# Altium PCB EXPANSION_BOARD.PcbDoc (part 1 of 2)
Units mm, origin at the board's own origin, x right, y up, seen from the top; angles counter-clockwise.
Board outline 115 x 60 mm, 2 copper layers (Top Layer, Bottom Layer), stack 1.58 mm thick; 104 components, 102 nets, 387 pads, 32 vias.
Unrouted connection lines stored in the file: 210.
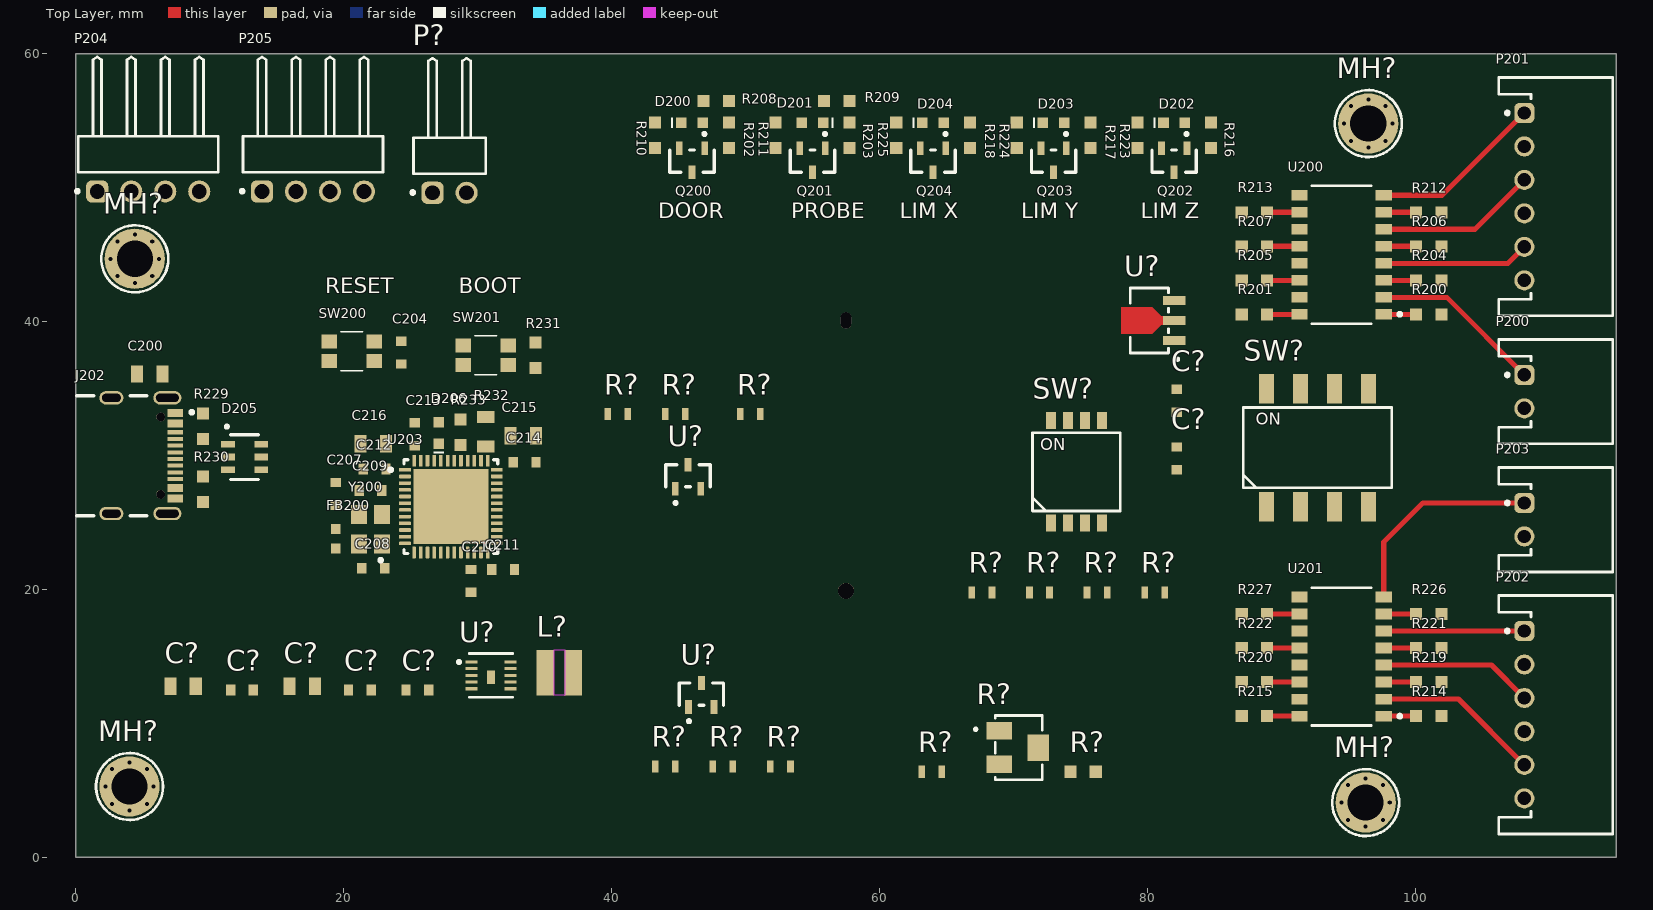
[diagram p0: Top Layer view]
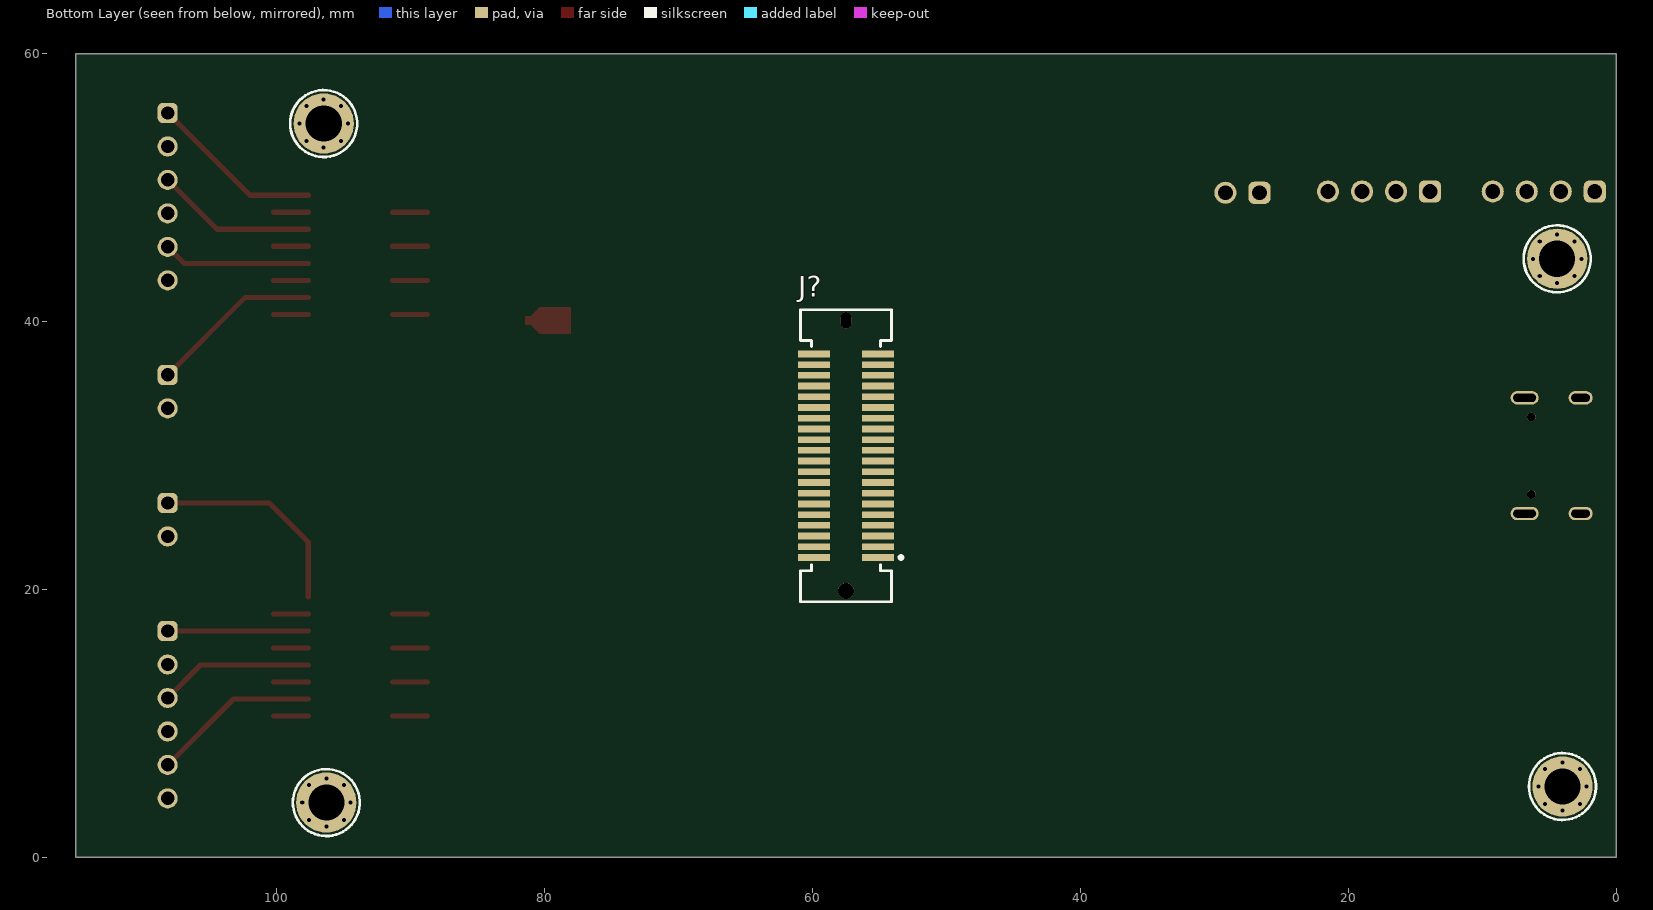
[diagram p1: Bottom Layer view, seen from below]

## Layer stack, top to bottom
Top Solder: solder mask 0.0102, Solder Resist, Dk 3.5
Top Layer: signal copper 0.0356
Dielectric 1: dielectric 1.5086, FR-4, Dk 4.8
Bottom Layer: signal copper 0.0356
Bottom Solder: solder mask 0.0102, Solder Resist, Dk 3.5

## Board outline
0,0 115,0 115,60 0,60

## Design rules (kind name [scope] priority, off if disabled: settings)
Clearance [All] p1: gap=0.15 ignorepadtopadclearanceinfootprint=FALSE
DiffPairsRouting [All] p1: maxlimit=0.254 minlimit=0.254 mostfreqgap=0.254 toplayer_minwidth=0.381 toplayer_maxwidth=0.381 toplayer_prefwidth=0.381 bottomlayer_minwidth=0.381 bottomlayer_maxwidth=0.381 bottomlayer_prefwidth=0.381 maxuncoupledlength=12.7
MinimumSolderMaskSliver [All] p1: minsoldermaskwidth=0.15
PolygonConnect [All] p1: connectstyle=Relief reliefconductorwidth=0.254 reliefentries=4 polygonreliefangle="90 Angle" airgapwidth=0.254
RoutingVias [All] p1: holewidth=0.711 width=1.27 viastyle="Through Hole" minholewidth=0.711 minwidth=1.27 maxholewidth=0.711 maxwidth=1.27
SolderMaskExpansion [All] p1: expansion=0 istentingtop=FALSE
SupplyNets "Schematic Supply Nets_10" [InNet('+3V3_ISO')] p1: voltage=0.000
SupplyNets "Schematic Supply Nets_9" [InNet('+VREF_DCMT')] p2: voltage=0.000
SupplyNets "Schematic Supply Nets_8" [InNet('+VREF_STPR')] p3: voltage=0.000
SupplyNets "Schematic Supply Nets_7" [InNet('+24V_PSU')] p4: voltage=0.000
SupplyNets "Schematic Supply Nets_6" [InNet('+VBUS')] p5: voltage=0.000
SupplyNets "Schematic Supply Nets_5" [InNet('+VDD_MCU')] p6: voltage=0.000
SupplyNets "Schematic Supply Nets_4" [InNet('+3V3')] p7: voltage=0.000
SupplyNets "Schematic Supply Nets_2" [InNet('GND')] p8: voltage=0.000
SupplyNets "Schematic Supply Nets_1" [InNet('+5V_ISO')] p9: voltage=0.000
SupplyNets "Schematic Supply Nets" [InNet('GND_ISO')] p10: voltage=0.000
Width [All] p1: maxlimit=1.27 minlimit=0.254 preferedwidth=0.508
28 further rules are at their usual default settings.

## Classes and differential pairs
component class 3_TEMP: C? J? L? MH? P? R? SW? U?
differential pair class USB: USB_D USB_DI
component class 1_MICROCONTROLADOR: C200 C204 C207 C208 C209 C210 C211 C212 C213 C214 C215 C216 D205 D206 FB200 J202 P204 P205 R229 R230 R231 R232 R233 SW200 SW201 U203 Y200
component class 2_INTERFACES_EXTERNAS: D200 D201 D202 D203 D204 P200 P201 P202 P203 Q200 Q201 Q202 Q203 Q204 R200 R201 R202 R203 R204 R205 R206 R207 R208 R209 R210 R211 R212 R213 R214 R215 R216 R217 R218 R219 R220 R221 R222 R223 R224 R225 R226 R227 U200 U201
differential pair USB_DI: +USB_DI_P -USB_DI_N
differential pair USB_D: +USB_D_P -USB_D_N

## Components (designator, comment, footprint, x,y, rotation, side; value= is the part's Value field where it differs from the comment)
C200 "4.7μF" WCAP-CSGP_0805_L2W1.25H1.25 5.5,36.1 r180 top
C204 "100nF, 16V" WCAP-CSGP_0603_L1.6W0.8H0.8_Wave 24.3,37.7 r270 top
C207 "100nF, 50V" WCAP-CSGP_0603_L1.6W0.8H0.8_Wave 19.4,27.15 r90 top
C208 "22pF, 16V" WCAP-CSGP_0603_L1.6W0.8H0.8_Wave 22.2,21.6 r0 top
C209 "22pF, 16V" WCAP-CSGP_0603_L1.6W0.8H0.8_Wave 22,27.4 r180 top
C210 "2.2μF" WCAP-CSGP_0603_L1.6W0.8H0.8_Wave 29.5,20.65 r90 top
C211 "100nF, 50V" WCAP-CSGP_0603_L1.6W0.8H0.8_Wave 31.9,21.5 r180 top
C212 "100nF, 50V" WCAP-CSGP_0603_L1.6W0.8H0.8_Wave 22.3,29 r0 top
C213 "100nF, 50V" WCAP-CSGP_0603_L1.6W0.8H0.8_Wave 25.3,31.6 r270 top
C214 "100nF, 50V" WCAP-CSGP_0603_L1.6W0.8H0.8_Wave 33.5,29.5 r180 top
C215 "10μF, 10V" WCAP-CSGP_0805_L2W1.25H1.25 33.4,31.5 r180 top
C216 "NM" WCAP-CSGP_0805_L2W1.25H1.25 22.2,30.9 r0 top
C? "1μF" WCAP-CSGP_0603_L1.6W0.8H0.8_Wave 82.2,29.8 r90 top
C? "1μF" WCAP-CSGP_0603_L1.6W0.8H0.8_Wave 82.2,34.1 r90 top
C? "470nF, 50V" WCAP-CSGP_0805_L2W1.25H1.25 8,12.8 r0 top
C? "220nF, 10V" WCAP-CSGP_0603_L1.6W0.8H0.8_Wave 25.5,12.5 r0 top
C? "2.2μF, 10V" WCAP-CSGP_0603_L1.6W0.8H0.8_Wave 21.2,12.5 r0 top
C? "1μF, 50V" WCAP-CSGP_0805_L2W1.25H1.25 16.9,12.8 r0 top
C? "100nF, 50V" WCAP-CSGP_0603_L1.6W0.8H0.8_Wave 12.4,12.5 r0 top
D200 "Blue, 3.2V, 140deg" WL-SMCW_0603_150060xx75003 46,54.865 r0 top
D201 "Yellow, 2V, 140deg" WL-SMCW_0603_150060xx75000 55,54.865 r180 top
D202 "Red, 2V, 140deg" WL-SMCW_0603_150060xx75003 82,54.865 r0 top
D203 "Red, 2V, 140deg" WL-SMCW_0603_150060xx75003 73,54.865 r0 top
D204 "Red, 2V, 140deg" WL-SMCW_0603_150060xx75003 64,54.865 r0 top
D205 "USBLC6-2SC6Y" SOT-23-6 12.6,29.9 r0 top value=2.5pF
D206 "Bright Green, 2V, 140deg" WL-SMCW_0603_150060xx75000 27.1,31.7 r90 top
FB200 "1000Ω" WE-CBF_0603_L1.6W0.8H0.8_HS_WB 19.4,23.8 r270 top
J202 "USB4105-GF-A" USB4105-GF-A 2.65,30 r270 top
J? "658801103040" 658801103040 57.5,30 r90 bottom
L? "47uH" WE-MAIA_3015 36.1,13.8 r0 top
MH? "Mounting Hole 2.5mm" MOUNTING_HOLE_M2P5_PLATED 4.4,44.7 r0 top
MH? "Mounting Hole 2.5mm" MOUNTING_HOLE_M2P5_PLATED 4,5.3 r0 top
MH? "Mounting Hole 2.5mm" MOUNTING_HOLE_M2P5_PLATED 96.5,54.8 r0 top
MH? "Mounting Hole 2.5mm" MOUNTING_HOLE_M2P5_PLATED 96.3,4.1 r0 top
P200 "68800211722" 68800211722 110.5,34.78 r90 top
P201 "68800611722" 68800611722 110.5,49.34 r90 top
P202 "68800611722" 68800611722 110.5,10.66 r90 top
P203 "68800211722" 68800211722 110.5,25.22 r90 top
P204 "61300411021" 61300411021 5.4,52.5 r180 top
P205 "61300411021" 61300411021 17.7,52.5 r180 top
P? "61300211021" 61300211021 27.9,52.4 r180 top
Q200 "SBC817-40LT3G" SOT-23-3 46,52 r180 top
Q201 "SBC817-40LT3G" SOT-23-3 55,52 r180 top
Q202 "SBC817-40LT3G" SOT-23-3 82,52 r180 top
Q203 "SBC817-40LT3G" SOT-23-3 73,52 r180 top
Q204 "SBC817-40LT3G" SOT-23-3 64,52 r180 top
R200 "487Ω" 0603-WAVE 101,40.555 r180 top
R201 "10kΩ" 0603-WAVE 88,40.555 r180 top
R202 "17.8kΩ" 0603-WAVE 48.75,53.915 r90 top
R203 "17.8kΩ" 0603-WAVE 57.75,53.915 r90 top
R204 "487Ω" 0603-WAVE 101,43.095 r180 top
R205 "10kΩ" 0603-WAVE 88,43.095 r180 top
R206 "487Ω" 0603-WAVE 101,45.635 r180 top
R207 "10kΩ" 0603-WAVE 88,45.635 r180 top
R208 "10kΩ" 0603-WAVE 47.8,56.5 r0 top
R209 "10kΩ" 0603-WAVE 56.8,56.5 r0 top
R210 "200Ω" 0603-WAVE 43.25,53.915 r270 top
R211 "200Ω" 0603-WAVE 52.25,53.915 r270 top
R212 "487Ω" 0603-WAVE 101,48.175 r180 top
R213 "10kΩ" 0603-WAVE 88,48.175 r180 top
R214 "487Ω" 0603-WAVE 101,10.555 r180 top
R215 "10kΩ" 0603-WAVE 88,10.555 r180 top
R216 "17.8kΩ" 0603-WAVE 84.75,53.915 r90 top
R217 "17.8kΩ" 0603-WAVE 75.75,53.915 r90 top
R218 "17.8kΩ" 0603-WAVE 66.75,53.915 r90 top
R219 "487Ω" 0603-WAVE 101,13.095 r180 top
R220 "10kΩ" 0603-WAVE 88,13.095 r180 top
R221 "487Ω" 0603-WAVE 101,15.635 r180 top
R222 "10kΩ" 0603-WAVE 88,15.635 r180 top
R223 "200Ω" 0603-WAVE 79.25,53.915 r270 top
R224 "200Ω" 0603-WAVE 70.25,53.915 r270 top
R225 "200Ω" 0603-WAVE 61.25,53.915 r270 top
R226 "487Ω" 0603-WAVE 101,18.175 r180 top
R227 "10kΩ" 0603-WAVE 88,18.175 r180 top
R229 "5.11kΩ" 0603-WAVE 9.5,32.2 r270 top
R230 "5.11kΩ" 0603-WAVE 9.5,27.5 r90 top
R231 "10kΩ" 0603-WAVE 34.3,37.5 r270 top
R232 "0Ω" 0805-WAVE 30.6,31.8 r270 top
R233 "200Ω" 0603-WAVE 28.7,31.75 r270 top
R? "10kΩ" 0603-REFLOW 80.55,19.8 r180 top
R? "0Ω" 0603-WAVE 75.2,6.4 r0 top
R? "100Ω" 0603-REFLOW 44.75,33.1 r0 top
R? "100Ω" 0603-REFLOW 40.45,33.1 r0 top
R? "10kΩ" 0603-REFLOW 71.95,19.8 r180 top
R? "10kΩ" 0603-REFLOW 67.65,19.8 r180 top
R? "10kΩ" 0603-REFLOW 76.25,19.8 r180 top
R? "10kΩ, 1/4W" TRIM-3224W 70.4,8.2 r0 top value=10kΩ
R? "11.5kΩ" 0603-REFLOW 48.3,6.8 r0 top
R? "11.5kΩ" 0603-REFLOW 50.35,33.1 r0 top
R? "1kΩ" 0603-REFLOW 63.9,6.4 r0 top
R? "8.87kΩ" 0603-REFLOW 52.6,6.8 r0 top
R? "8.87kΩ" 0603-REFLOW 44,6.8 r0 top
SW200 "434153017835" 434153017835 20.6,37.8 r180 top
SW201 "434153017835" 434153017835 30.6,37.5 r180 top
SW? "418121270804" 418121270804 92.7,30.6 r0 top
SW? "416131160804" 416131160804 74.7,28.8 r0 top
U200 "TLP293-4" SO-16 94.5,45 r180 top
U201 "TLP293-4" SO-16 94.5,15 r180 top
U203 "STM32F411CEU6" UFQFN-48-7X7_EXPOSED_PAD 28,26.2 r0 top
U? "LDK220U33R" SOT-89 78.2,39.1 r90 top
U? "L7983PU33R" 10-WFDFN-EP 31,13.6 r0 top
U? "TS3431CILT" SOT-23-3 46.7,12.2 r0 top
U? "TS3431CILT" SOT-23-3 45.7,28.5 r0 top
Y200 "25MHz" WE-XTAL_CFPX-180 22,24.5 r90 top

## Footprints (in the part's own frame and the unit in brackets; to place one, negate y for a bottom-side part, rotate by r counter-clockwise, add the part's x,y. Pads: shape width x height; smd on the part's side, far side on the other; paste and mask are expansions set on the pad)
10-WFDFN-EP [mil]
  rect 35.43x9 smd paste+0 mask+0: 1(-57,39.37) 2(-57,19.68) 3(-57,0) 4(-57,-19.69) 5(-57,-39.37) 6(57,-39.37) 7(57,-19.69) 8(57,0) 9(57,19.68) 10(57,39.37)
  rect 24x39 smd paste+0 mask+0: 11(0,-5.91)
  silkscreen extent -98,-64 64,64, body extent -59,-59 59,59, height 30
0603-REFLOW [mm]
  rect 0.5x0.9 smd: 1(-0.75,0) 2(0.75,0)
  body extent -0.8,-0.4 0.8,0.4, height 0.45
0603-WAVE [mm]
  rect 0.9x0.9 smd: 1(-0.95,0) 2(0.95,0)
  body extent -0.8,-0.4 0.8,0.4, height 0.45
0805-WAVE [mm]
  rect 0.9x1.3 smd: 1(-1.1,0) 2(1.1,0)
  body extent -1,-0.63 1,0.62, height 0.5
61300211021 [mm] "Pin Header, pitch 2.54 mm, THT, Angled, single row, 2p"
  rrect50% 1.65x1.65 hole 1.1: 1(1.27,2.77)
  round 1.65 hole 1.1: 2(-1.27,2.77)
  silkscreen extent -2.69,-7.27 2.87,2.87, body extent -2.54,-7.27 2.54,3.09, height 2.58
61300411021 [mm] "Pin Header, pitch 2.54 mm, THT, Angled, single row, 4p"
  rrect50% 1.65x1.65 hole 1.1: 1(3.81,2.77)
  round 1.65 hole 1.1: 2(1.27,2.77) 3(-1.27,2.77) 4(-3.81,2.77)
  silkscreen extent -5.23,-7.27 5.41,2.87, body extent -5.08,-7.27 5.08,3.09, height 2.58
68800211722 [mm] "2.50mm ¡°J¡± Type Male Horizontal Shrouded Header, 2p"
  rrect50% 1.5x1.5 hole 1: 1(1.25,2.35)
  round 1.5 hole 1: 2(-1.25,2.35)
  silkscreen extent -3.9,-4.25 3.9,4.25, body extent -3.75,-4.15 3.75,4.15, height 4.23
68800611722 [mm] "2.50mm ¡°J¡± Type Male Horizontal Shrouded Header, 6p"
  rrect50% 1.5x1.5 hole 1: 1(6.25,2.35)
  round 1.5 hole 1: 2(3.75,2.35) 3(1.25,2.35) 4(-1.25,2.35) 5(-3.75,2.35) 6(-6.25,2.35)
  silkscreen extent -8.9,-4.25 8.9,4.25, body extent -8.75,-4.15 8.75,4.15, height 4.23
416131160804 [mm] "SMD Dip Switch, Small Compact, Raised Actuator, 4pin"
  rect 0.76x1.27 smd: 1(-1.905,-3.81) 2(-0.635,-3.81) 3(0.635,-3.81) 4(1.905,-3.81) 5(1.905,3.81) 6(0.635,3.81) 7(-0.635,3.81) 8(-1.905,3.81)
  silkscreen extent -3.27,-2.93 3.27,2.93, body extent -3.12,-4.22 3.13,4.22, height 2.7
418121270804 [mm] "2.54 mm small compact SMD with raised actuator, 04p"
  rect 1.1x2.2 smd: 1(-3.81,-4.4) 2(-1.27,-4.4) 3(1.27,-4.4) 4(3.81,-4.4) 5(3.81,4.4) 6(1.27,4.4) 7(-1.27,4.4) 8(-3.81,4.4)
  silkscreen extent -5.55,-3 5.55,3, body extent -5.3,-4.85 5.3,4.85, height 4.41
434153017835 [mm] "Tact Switch, SMD, body 3.5x2.9mm"
  rect 1.15x1.05 smd: A1(-1.675,0.725) A2(1.675,0.725) B1(-1.675,-0.725) B2(1.675,-0.725)
  silkscreen extent -0.8,-1.45 0.8,1.45, body extent -2.15,-1.45 2.15,1.45, height 1.7
658801103040 [mm] "0.80mm SMT Female Shrouded Vertical Receptacle 11.75mm height, 40p"
  rect 0.5x2.4 smd: 1(-7.6,-2.4) 2(-7.6,2.4) 3(-6.8,-2.4) 4(-6.8,2.4) 5(-6,-2.4) 6(-6,2.4) 7(-5.2,-2.4) 8(-5.2,2.4) 9(-4.4,-2.4) 10(-4.4,2.4) 11(-3.6,-2.4) 12(-3.6,2.4) 13(-2.8,-2.4) 14(-2.8,2.4) 15(-2,-2.4) 16(-2,2.4) 17(-1.2,-2.4) 18(-1.2,2.4) 19(-0.4,-2.4) 20(-0.4,2.4) 21(0.4,-2.4) 22(0.4,2.4) 23(1.2,-2.4) 24(1.2,2.4) 25(2,-2.4) 26(2,2.4) 27(2.8,-2.4) 28(2.8,2.4) 29(3.6,-2.4) 30(3.6,2.4) 31(4.4,-2.4) 32(4.4,2.4) 33(5.2,-2.4) 34(5.2,2.4) 35(6,-2.4) 36(6,2.4) 37(6.8,-2.4) 38(6.8,2.4) 39(7.6,-2.4) 40(7.6,2.4)
  round 1.2 hole 1.2 unplated: M1(-10.1,0)
  oval 1.2x0.8 hole 0.8 slot 1.2 at 0 deg unplated: M2(10.1,0)
  silkscreen extent -10.9,-4.22 10.9,3.4, body extent -10.9,-3.4 10.9,3.4, height 11.97
MOUNTING_HOLE_M2P5_PLATED [mm]
  round 4.5 hole 2.7: H(0,0)
  silkscreen extent -2.5,-2.5 2.5,2.5
SO-16 [mm]
  rect 1.2x0.8 smd: 1(-3.15,4.445) 2(-3.15,3.175) 3(-3.15,1.905) 4(-3.15,0.635) 5(-3.15,-0.635) 6(-3.15,-1.905) 7(-3.15,-3.175) 8(-3.15,-4.445) 9(3.15,-4.445) 10(3.15,-3.175) 11(3.15,-1.905) 12(3.15,-0.635) 13(3.15,0.635) 14(3.15,1.905) 15(3.15,3.175) 16(3.15,4.445)
  silkscreen extent -4.48,-5.15 2.23,5.15, body extent -3.5,-5.15 3.5,5.15, height 2.3
SOT-23-3 [mil]
  rect 20x40 smd mask+3.94: 1(-37.4,-38) 2(37.4,-38) 3(0,32.75)
  silkscreen extent -65,-84 65,33, body extent -57,-47 57,47, height 44
SOT-23-6 [mil]
  rect 40x20 smd paste+0: 1(-49,37.4) 2(-49,0) 3(-49,-37.4) 4(49,-37.4) 5(49,0) 6(49,37.4)
  silkscreen extent -56,-66 40,93, body extent -49,-59 49,59, height 43
SOT-89 [mm]
  rect 0.65x1.7 smd paste+0: 1(-0.495,-3.806) 2(1,-3.806) 3(2.495,-3.806)
  Top Layer region: 1.325,-3.251 0.675,-3.251 0.675,-2.85 0,-2.175 0,0.15 2,0.15 2,-2.175 1.325,-2.85
  silkscreen extent -2,-4.16 3.43,-0.53, body extent -1.3,-4.46 3.3,-0.21, height 1.35
TRIM-3224W [mm]
  rect 1.9x1.3 smd: 1(-1.45,1.25) 3(-1.45,-1.25)
  rect 1.6x2 smd: 2(1.45,0)
  silkscreen extent -3.32,-2.4 1.75,2.4, body extent -1.95,-2.4 1.95,2.4, height 5.3
UFQFN-48-7X7_EXPOSED_PAD [mm]
  rrect25% 0.87x0.27 smd mask+0: 1(-3.43,2.75) 2(-3.43,2.25) 3(-3.43,1.75) 4(-3.43,1.25) 5(-3.43,0.75) 6(-3.43,0.25) 7(-3.43,-0.25) 8(-3.43,-0.75) 9(-3.43,-1.25) 10(-3.43,-1.75) 11(-3.43,-2.25) 12(-3.43,-2.75) 25(3.43,-2.75) 26(3.43,-2.25) 27(3.43,-1.75) 28(3.43,-1.25) 29(3.43,-0.75) 30(3.43,-0.25) 31(3.43,0.25) 32(3.43,0.75) 33(3.43,1.25) 34(3.43,1.75) 35(3.43,2.25) 36(3.43,2.75)
  rrect25% 0.27x0.87 smd mask+0: 13(-2.75,-3.43) 14(-2.25,-3.43) 15(-1.75,-3.43) 16(-1.25,-3.43) 17(-0.75,-3.43) 18(-0.25,-3.43) 19(0.25,-3.43) 20(0.75,-3.43) 21(1.25,-3.43) 22(1.75,-3.43) 23(2.25,-3.43) 24(2.75,-3.43) 37(2.75,3.43) 38(2.25,3.43) 39(1.75,3.43) 40(1.25,3.43) 41(0.75,3.43) 42(0.25,3.43) 43(-0.25,3.43) 44(-0.75,3.43) 45(-1.25,3.43) 46(-1.75,3.43) 47(-2.25,3.43) 48(-2.75,3.43)
  rect 5.6x5.6 smd paste-4 mask+0: 49(0,0)
  silkscreen extent -4.63,-3.5 3.5,3.5, body extent -3.5,-3.5 3.5,3.5, height 0.6
USB4105-GF-A [mm]
  rect 0.6x1.15 smd mask+0: A1_B12(-3.2,4.755) A4_B9(-2.4,4.755) B1_A12(3.2,4.755) B4_A9(2.4,4.755)
  rect 0.3x1.15 smd mask+0: A5(-1.25,4.755) A6(-0.25,4.755) A7(0.25,4.755) A8(1.25,4.755) B5(1.75,4.755) B6(0.75,4.755) B7(-0.75,4.755) B8(-1.75,4.755)
  oval 1x2.1 hole 0.6 slot 1.7 at 90 deg: SH(-4.32,4.18) SH(4.32,4.18)
  oval 1x1.8 hole 0.6 slot 1.4 at 90 deg: SH(-4.32,0) SH(4.32,0)
  round 0.65 hole 0.65 unplated: ""(-2.89,3.68) ""(2.89,3.68)
  silkscreen extent -4.47,-2.6 4.47,6.13, body extent -4.47,-2.6 4.47,5.11, height 3.31
WCAP-CSGP_0603_L1.6W0.8H0.8_Wave [mm] "Ceramic Capacitors, 0603, body 1.6x0.8mm"
  rect 0.7x0.8 smd: 1(-0.85,0) 2(0.85,0)
  body extent -0.8,-0.4 0.8,0.4, height 0.8
WCAP-CSGP_0805_L2W1.25H1.25 [mm] "Ceramic Capacitors, body 2x1.25mm"
  rect 0.9x1.3 smd: 1(-0.95,0) 2(0.95,0)
  body extent -1,-0.63 1,0.63, height 1.25
WE-CBF_0603_L1.6W0.8H0.8_HS_WB [mm] "SMD EMI Suppression Ferrite  Bead, body 1.60x0.80mm"
  rect 0.75x0.7 smd: 1(-0.725,0) 2(0.725,0)
  body extent -0.8,-0.4 0.8,0.4, height 0.8
WE-MAIA_3015 [mm] "SMD Power Inductor, 2-leads, body 3x3mm"
  rect 1.3x3.4 smd: 1(-1.05,0) 2(1.05,0)
  Top Layer keep-out region: -0.4,1.7 0.4,1.7 0.4,-1.7 -0.4,-1.7
  body extent -1.5,-1.5 1.5,1.5, height 1.5
WE-XTAL_CFPX-180 [mm] "Quartz Crystal, size CFPX-180, body 3.4x2.7mm"
  rect 1.4x1.2 smd: 1(-1.1,-0.85) 2(1.1,-0.85) 3(1.1,0.85) 4(-1.1,0.85)
  silkscreen extent -2.42,-0.88 -2.18,-0.63, body extent -1.7,-1.35 1.7,1.35, height 0.8
WL-SMCW_0603_150060xx75000 [mm] "SMD Mono-color Chip LED, body 1.60 x 0.80 mm"
  rect 0.8x0.8 smd: 1(-0.8,0) 2(0.8,0)
  silkscreen extent -1.55,-0.4 -1.4,0.4, body extent -0.8,-0.4 0.8,0.4, height 0.7
WL-SMCW_0603_150060xx75003 [mm] "SMD Mono-color Chip LED, body 1.6x0.8mm"
  rect 0.8x0.8 smd: 1(-0.8,0) 2(0.8,0)
  silkscreen extent -1.55,-0.4 -1.4,0.4, body extent -0.8,-0.4 0.8,0.4, height 0.7

## Part data
C200: library part 885012207053, "WCAP-CSGP Multilayer Ceramic Chip Capacitor, General Purpose, size 0805, 4.7μF, 16V", Capacitance=4.7uF, Capacitance Tolerance=+/-10%, Case/Size Code=0805, Insulation Resistance=0.02Gohm, Manufacturer="Wurth Elektronik", Operating Temperature Max=125degC, Operating Temperature Min=-55degC, Rated Voltage (DC)=16V, Category="Multilayer Ceramic Chip Capacitors", Ceramic Type=X7R, ComponentLink1Description="Website Link", ComponentLink1URL=https://www.we-online.com/redexpert/article/885012207053?ad, ComponentLink2Description="Datasheet Link", ComponentLink2URL=https://www.we-online.com/redexpert/spec/885012207053?ad, Dissipation Factor=10%, Height=1.25mm, Length=2mm, Manufacturer Part Number=885012207053, Match Code=WCAP-CSGP, Mount="Surface Mount", Packaging="Tape and Reel", Technical Reference=X7R0805475K016DFCT10000, Width=1.25mm
C204: library part 885012206046, "WCAP-CSGP Multilayer Ceramic Chip Capacitor, General Purpose, size 0603, 100nF, 16V", Capacitance=100nF, Capacitance Tolerance=+/-10%, Case/Size Code=0603, Insulation Resistance=5Gohm, Manufacturer="Wurth Elektronik", Operating Temperature Max=125degC, Operating Temperature Min=-55degC, Rated Voltage (DC)=16V, Category="Multilayer Ceramic Chip Capacitors", Ceramic Type=X7R, ComponentLink1Description="Website Link", ComponentLink1URL=https://www.we-online.com/redexpert/article/885012206046?ad, ComponentLink2Description="Datasheet Link", ComponentLink2URL=https://www.we-online.com/redexpert/spec/885012206046?ad, Dissipation Factor=3.5%, Height=0.8mm, Length=1.6mm, Manufacturer Part Number=885012206046, Match Code=WCAP-CSGP, Mount="Surface Mount", Packaging="Tape and Reel", Technical Reference=X7R0603104K016DFCT10000, Width=0.8mm
C207 C211 C212 C213 C214 C?: library part 885012206095, "WCAP-CSGP Multilayer Ceramic Chip Capacitor, General Purpose, size 0603, 100nF, 50V", Capacitance=100nF, Capacitance Tolerance=+/-10%, Case/Size Code=0603, Insulation Resistance=5Gohm, Manufacturer="Wurth Elektronik", Operating Temperature Max=125degC, Operating Temperature Min=-55degC, Rated Voltage (DC)=50V, Category="Multilayer Ceramic Chip Capacitors", Ceramic Type=X7R, ComponentLink1Description="Website Link", ComponentLink1URL=https://www.we-online.com/redexpert/article/885012206095?ad, ComponentLink2Description="Datasheet Link", ComponentLink2URL=https://www.we-online.com/redexpert/spec/885012206095?ad, Dissipation Factor=3%, Height=0.8mm, Length=1.6mm, Manufacturer Part Number=885012206095, Match Code=WCAP-CSGP, Mount="Surface Mount", Packaging="Tape and Reel", Technical Reference=X7R0603104K050DFCT10000, Width=0.8mm
C208 C209: library part 885012006019, "WCAP-CSGP Multilayer Ceramic Chip Capacitor, General Purpose, size 0603, 22pF, 16V", Capacitance=22pF, Capacitance Tolerance=+/-5%, Case/Size Code=0603, Insulation Resistance=10Gohm, Manufacturer="Wurth Elektronik", Operating Temperature Max=125degC, Operating Temperature Min=-55degC, Rated Voltage (DC)=16V, Category="Multilayer Ceramic Chip Capacitors", Ceramic Type=NP0, ComponentLink1Description="Website Link", ComponentLink1URL=https://www.we-online.com/redexpert/article/885012006019?ad, ComponentLink2Description="Datasheet Link", ComponentLink2URL=https://www.we-online.com/redexpert/spec/885012006019?ad, Height=0.8mm, Length=1.6mm, Manufacturer Part Number=885012006019, Match Code=WCAP-CSGP, Mount="Surface Mount", Packaging="Tape and Reel", Q Factor=840, Technical Reference=NP00603220J016DFCT10000, Width=0.8mm
C210: library part 885012106004, "WCAP-CSGP Multilayer Ceramic Chip Capacitor, General Purpose, size 0603, 2.2μF, 6.3V", Capacitance=2.2uF, Capacitance Tolerance=+/-20%, Case/Size Code=0603, Insulation Resistance=0.05Gohm, Manufacturer="Wurth Elektronik", Operating Temperature Max=85degC, Operating Temperature Min=-55degC, Rated Voltage (DC)=6.3V, Category="Multilayer Ceramic Chip Capacitors", Ceramic Type=X5R, ComponentLink1Description="Website Link", ComponentLink1URL=https://www.we-online.com/redexpert/article/885012106004?ad, ComponentLink2Description="Datasheet Link", ComponentLink2URL=https://www.we-online.com/redexpert/spec/885012106004?ad, Dissipation Factor=10%, Height=0.8mm, Length=1.6mm, Manufacturer Part Number=885012106004, Match Code=WCAP-CSGP, Mount="Surface Mount", Packaging="Tape and Reel", Technical Reference=X5R0603225M6R3DFCT10000, Width=0.8mm
C215 C216: library part 885012207026, "WCAP-CSGP Multilayer Ceramic Chip Capacitor, General Purpose, size 0805, 10μF, 10V", Capacitance=10uF, Capacitance Tolerance=+/-10%, Case/Size Code=0805, Insulation Resistance=0.01Gohm, Manufacturer="Wurth Elektronik", Operating Temperature Max=125degC, Operating Temperature Min=-55degC, Rated Voltage (DC)=10V, Category="Multilayer Ceramic Chip Capacitors", Ceramic Type=X7R, ComponentLink1Description="Website Link", ComponentLink1URL=https://www.we-online.com/redexpert/article/885012207026?ad, ComponentLink2Description="Datasheet Link", ComponentLink2URL=https://www.we-online.com/redexpert/spec/885012207026?ad, Dissipation Factor=10%, Height=1.25mm, Length=2mm, Manufacturer Part Number=885012207026, Match Code=WCAP-CSGP, Mount="Surface Mount", Packaging="Tape and Reel", Technical Reference=X7R0805106K010DFCT10000, Width=1.25mm
C? C?: library part 885012206052, "WCAP-CSGP Multilayer Ceramic Chip Capacitor, General Purpose, size 0603, 1μF, 16V", Capacitance=1uF, Capacitance Tolerance=+/-10%, Case/Size Code=0603, Insulation Resistance=0.1Gohm, Manufacturer="Wurth Elektronik", Operating Temperature Max=125degC, Operating Temperature Min=-55degC, Rated Voltage (DC)=16V, Category="Multilayer Ceramic Chip Capacitors", Ceramic Type=X7R, ComponentLink1Description="Website Link", ComponentLink1URL=https://www.we-online.com/redexpert/article/885012206052?ad, ComponentLink2Description="Datasheet Link", ComponentLink2URL=https://www.we-online.com/redexpert/spec/885012206052?ad, Dissipation Factor=10%, Height=0.8mm, Length=1.6mm, Manufacturer Part Number=885012206052, Match Code=WCAP-CSGP, Mount="Surface Mount", Packaging="Tape and Reel", Technical Reference=X7R0603105K016DFCT10000, Width=0.8mm
C?: library part 885012207102, "WCAP-CSGP Multilayer Ceramic Chip Capacitor, General Purpose, size 0805, 470nF, 50V", Capacitance=470nF, Capacitance Tolerance=+/-10%, Case/Size Code=0805, Insulation Resistance=1.1Gohm, Manufacturer="Wurth Elektronik", Operating Temperature Max=125degC, Operating Temperature Min=-55degC, Rated Voltage (DC)=50V, Category="Multilayer Ceramic Chip Capacitors", Ceramic Type=X7R, ComponentLink1Description="Website Link", ComponentLink1URL=https://www.we-online.com/redexpert/article/885012207102?ad, ComponentLink2Description="Datasheet Link", ComponentLink2URL=https://www.we-online.com/redexpert/spec/885012207102?ad, Dissipation Factor=3%, Height=1.25mm, Length=2mm, Manufacturer Part Number=885012207102, Match Code=WCAP-CSGP, Mount="Surface Mount", Packaging="Tape and Reel", Technical Reference=X7R0805474K050DFCT10000, Width=1.25mm
C?: library part 885012206022, "WCAP-CSGP Multilayer Ceramic Chip Capacitor, General Purpose, size 0603, 220nF, 10V", Capacitance=220nF, Capacitance Tolerance=+/-10%, Case/Size Code=0603, Insulation Resistance=2.3Gohm, Manufacturer="Wurth Elektronik", Operating Temperature Max=125degC, Operating Temperature Min=-55degC, Rated Voltage (DC)=10V, Category="Multilayer Ceramic Chip Capacitors", Ceramic Type=X7R, ComponentLink1Description="Website Link", ComponentLink1URL=https://www.we-online.com/redexpert/article/885012206022?ad, ComponentLink2Description="Datasheet Link", ComponentLink2URL=https://www.we-online.com/redexpert/spec/885012206022?ad, Dissipation Factor=5%, Height=0.8mm, Length=1.6mm, Manufacturer Part Number=885012206022, Match Code=WCAP-CSGP, Mount="Surface Mount", Packaging="Tape and Reel", Technical Reference=X7R0603224K010DFCT10000, Width=0.8mm
C?: library part 885012206027, "WCAP-CSGP Multilayer Ceramic Chip Capacitor, General Purpose, size 0603, 2.2μF, 10V", Capacitance=2.2uF, Capacitance Tolerance=+/-10%, Case/Size Code=0603, Insulation Resistance=0.02Gohm, Manufacturer="Wurth Elektronik", Operating Temperature Max=125degC, Operating Temperature Min=-55degC, Rated Voltage (DC)=10V, Category="Multilayer Ceramic Chip Capacitors", Ceramic Type=X7R, ComponentLink1Description="Website Link", ComponentLink1URL=https://www.we-online.com/redexpert/article/885012206027?ad, ComponentLink2Description="Datasheet Link", ComponentLink2URL=https://www.we-online.com/redexpert/spec/885012206027?ad, Dissipation Factor=10%, Height=0.8mm, Length=1.6mm, Manufacturer Part Number=885012206027, Match Code=WCAP-CSGP, Mount="Surface Mount", Packaging="Tape and Reel", Technical Reference=X7R0603225K010DFCT10000, Width=0.8mm
C?: library part 885012207103R, "WCAP-CSGP Multilayer Ceramic Chip Capacitor, General Purpose, size 0805, 1μF, 50V", Capacitance=1uF, Capacitance Tolerance=+/-10%, Case/Size Code=0805, Insulation Resistance=0.1Gohm, Manufacturer="Wurth Elektronik", Operating Temperature Max=125degC, Operating Temperature Min=-55degC, Rated Voltage (DC)=50V, Category="Multilayer Ceramic Chip Capacitors", Ceramic Type=X7R, ComponentLink1Description="Website Link", ComponentLink1URL=https://www.we-online.com/redexpert/article/885012207103R?ad, ComponentLink2Description="Datasheet Link", ComponentLink2URL=https://www.we-online.com/redexpert/spec/885012207103R?ad, Dissipation Factor=10%, Height=1.25mm, Length=2mm, Manufacturer Part Number=885012207103R, Match Code=WCAP-CSGP, Mount="Surface Mount", Packaging="Tape and Reel", Technical Reference=X7R0805105K050DFCT20000, Width=1.25mm
D200: library part 150060BS75003, "WL-SMCW Mono-color Chip LED Waterclear, SMT, size 0603, Blue, 3.2V, 140°", Case/Size Code=0603, Emitting Color=Blue, Forward Voltage=3.2V, Manufacturer="Wurth Elektronik", Operating Temperature Max=100degC, Operating Temperature Min=-40degC, Category="Signal LEDs", Chip Technology=InGaN, ComponentLink1Description="Website Link", ComponentLink1URL=https://www.we-online.com/redexpert/article/150060BS75003?ad, ComponentLink2Description="Datasheet Link", ComponentLink2URL=https://www.we-online.com/redexpert/spec/150060BS75003?ad, Dominant Wavelength=470nm, Height=0.7mm, Length=1.6mm, Luminous Intensity=350mcd, Manufacturer Part Number=150060BS75003, Match Code=WL-SMCW, Mount="Surface Mount", Packaging="Tape and Reel", Peak Wavelength=465nm, Viewing Angle=140deg, Width=0.8mm
D201: library part 150060YS75000, "WL-SMCW Mono-color Chip LED Waterclear, SMT, size 0603, Yellow, 2V, 140°", Case/Size Code=0603, Emitting Color=Yellow, Forward Voltage=2V, Manufacturer="Wurth Elektronik", Operating Temperature Max=85degC, Operating Temperature Min=-40degC, Category="Signal LEDs", Chip Technology=AlInGaP, ComponentLink1Description="Website Link", ComponentLink1URL=https://www.we-online.com/redexpert/article/150060YS75000?ad, ComponentLink2Description="Datasheet Link", ComponentLink2URL=https://www.we-online.com/redexpert/spec/150060YS75000?ad, Dominant Wavelength=590nm, Height=0.7mm, Length=1.6mm, Luminous Intensity=120mcd, Manufacturer Part Number=150060YS75000, Match Code=WL-SMCW, Mount="Surface Mount", Packaging="Tape and Reel", Peak Wavelength=595nm, Viewing Angle=140deg, Width=0.8mm
D202 D203 D204: library part 150060RS75003, "WL-SMCW Mono-color Chip LED Waterclear, SMT, size 0603, Red, 2V, 140°", Case/Size Code=0603, Emitting Color=Red, Forward Voltage=2V, Manufacturer="Wurth Elektronik", Operating Temperature Max=100degC, Operating Temperature Min=-40degC, Category="Signal LEDs", Chip Technology=AlInGaP, ComponentLink1Description="Website Link", ComponentLink1URL=https://www.we-online.com/redexpert/article/150060RS75003?ad, ComponentLink2Description="Datasheet Link", ComponentLink2URL=https://www.we-online.com/redexpert/spec/150060RS75003?ad, Dominant Wavelength=625nm, Height=0.7mm, Length=1.6mm, Luminous Intensity=530mcd, Manufacturer Part Number=150060RS75003, Match Code=WL-SMCW, Mount="Surface Mount", Packaging="Tape and Reel", Peak Wavelength=630nm, Viewing Angle=140deg, Width=0.8mm
D205: "TVS DIODE 5.25VWM 17VC SOT23-6", Breakdown Voltage=6V, Case/Package=SOT-23-6, Clamping Voltage=17V, Forward Voltage=860mV, Leakage Current=150nA, Manufacturer=STMicroelectronics, Max Junction Temperature (Tj)=150°C, Min Operating Temperature=-40°C, Operating Supply Voltage=1.1V, Peak Pulse Current=5A, Power Line Protection=Yes, Reverse Standoff Voltage=5.25V, Supplier Part Number=497-11882-1-ND, Test Current=1mA, Category="TVS Diodes", China RoHS=Compliant, ComponentLink1Description=https://datasheet.octopart.com:443/USBLC6-2SC6Y-STMicroelectronics-datasheet-12533815.pdf?src-supplier=ODG+(Origin+Data+Global), ComponentLink1URL=https://datasheet.octopart.com:443/USBLC6-2SC6Y-STMicroelectronics-datasheet-12533815.pdf?src-supplier=ODG+(Origin+Data+Global), ComponentLink2Description=https://datasheet.octopart.com:443/USBLC6-2SC6Y-STMicroelectronics-datasheet-13733956.pdf?src-supplier=STMicroelectronics, ComponentLink2URL=https://datasheet.octopart.com:443/USBLC6-2SC6Y-STMicroelectronics-datasheet-13733956.pdf?src-supplier=STMicroelectronics, ComponentLink3Description=https://datasheet.octopart.com:443/USBLC6-2SC6Y-STMicroelectronics-datasheet-10412581.pdf?src-supplier=Factory+Futures, ComponentLink3URL=https://datasheet.octopart.com:443/USBLC6-2SC6Y-STMicroelectronics-datasheet-10412581.pdf?src-supplier=Factory+Futures, ComponentLink4Description=https://datasheet.octopart.com:443/USBLC6-2SC6Y-STMicroelectronics-datasheet-525477.pdf?src-supplier=Factory+Futures, ComponentLink4URL=https://datasheet.octopart.com:443/USBLC6-2SC6Y-STMicroelectronics-datasheet-525477.pdf?src-supplier=Factory+Futures, Depth=1.75mm, Direction=Unidirectional, Element Configuration=Dual, ESD Protection=Yes, ESR=330Ω, Height=1.45mm, Lead Free="Lead Free", Length=3mm, Lifecycle Status=Production, Manufacturer Part Number=USBLC6-2SC6Y, Max Operating Temperature=150°C, Max Reverse Leakage Current=150nA, Min Breakdown Voltage=6V, Mounting Technology="Surface Mount", Number of Bidirectional Channels=2, Number of Channels=2, Number of Elements=1, Number of Terminals=6, Packaging="Tape and Reel", Peak Reverse Current=150nA, Pins=6, Polarity=Unidirectional, Pricing="1=0.46, 10=0.298, 100=0.211, 500=0.164, 1000=0.144 (USD)", Radiation Hardening=No, REACH SVHC=Yes, RoHS=Compliant, Schedule B="8536300000, 8536300000|8536300000|8536300000|8536300000|8536300000", Stock=64605, Supplier=DigiKey, Termination=SMD/SMT, Width=1.75mm
D206: library part 150060VS75000, "WL-SMCW Mono-color Chip LED Waterclear, SMT, size 0603, Bright Green, 2V, 140°", Case/Size Code=0603, Emitting Color="Bright Green", Forward Voltage=2V, Manufacturer="Wurth Elektronik", Operating Temperature Max=85degC, Operating Temperature Min=-40degC, Category="Signal LEDs", Chip Technology=AlInGaP, ComponentLink1Description="Website Link", ComponentLink1URL=https://www.we-online.com/redexpert/article/150060VS75000?ad, ComponentLink2Description="Datasheet Link", ComponentLink2URL=https://www.we-online.com/redexpert/spec/150060VS75000?ad, Dominant Wavelength=570nm, Height=0.7mm, Length=1.6mm, Luminous Intensity=40mcd, Manufacturer Part Number=150060VS75000, Match Code=WL-SMCW, Mount="Surface Mount", Packaging="Tape and Reel", Peak Wavelength=572nm, Viewing Angle=140deg, Width=0.8mm
FB200: library part 74279266, "WE-CBF SMT EMI Suppression Ferrite Bead, size 0603, 1000Ω, 0.65A", Case/Size Code=0603, DC Resistance Max=0.6Ω, Manufacturer="Wurth Elektronik", Operating Temperature Max=125degC, Operating Temperature Min=-55degC, Rated Current=0.65A, Category="Ferrites for PCB Assembly", ComponentLink1Description="Website Link", ComponentLink1URL=https://www.we-online.com/redexpert/article/74279266?ad, ComponentLink2Description="Datasheet Link", ComponentLink2URL=https://www.we-online.com/redexpert/spec/74279266?ad, Height=0.8mm, Impedance @100MHz=1000Ω, Impedance Max=1350Ω, Impedance Max Test Condition=140MHz, Length=1.6mm, Manufacturer Part Number=74279266, Match Code=WE-CBF, Mount="Surface Mount", Packaging="Tape and Reel", Type="Wide Band", Width=0.8mm
J202: "CONN RCP USB2.0 TYP C 16P SMD RA", Contact Resistance=50mΩ, Current Rating=6.25A, Dielectric Material="Liquid Crystal Polymer", Insulation Resistance=100MΩ, Manufacturer="Global Connector Technology", Max Operating Temperature=85°C, Min Operating Temperature=-40°C, Supplier Part Number=2073-USB4105-GF-ACT-ND, Voltage Rating=20V, Category="USB Connectors", China RoHS=Compliant, ComponentLink1Description=https://datasheet.octopart.com:443/USB4105-GF-A-GCT-datasheet-166929323.pdf?src-supplier=SOS+electronic, ComponentLink1URL=https://datasheet.octopart.com:443/USB4105-GF-A-GCT-datasheet-166929323.pdf?src-supplier=SOS+electronic, ComponentLink2Description=https://datasheet.octopart.com:443/USB4105-GF-A-GCT-datasheet-188935996.pdf?src-supplier=TME, ComponentLink2URL=https://datasheet.octopart.com:443/USB4105-GF-A-GCT-datasheet-188935996.pdf?src-supplier=TME, ComponentLink3Description=https://datasheet.octopart.com:443/USB4105-GF-A-GCT-datasheet-188869076.pdf?src-supplier=TME, ComponentLink3URL=https://datasheet.octopart.com:443/USB4105-GF-A-GCT-datasheet-188869076.pdf?src-supplier=TME, ComponentLink4Description=https://datasheet.octopart.com:443/USB4105-GF-A-GCT-datasheet-166927665.pdf?src-supplier=TME, ComponentLink4URL=https://datasheet.octopart.com:443/USB4105-GF-A-GCT-datasheet-166927665.pdf?src-supplier=TME, Contact Gender=Female, Contact Material="Gold, Nickel", Gender=Receptacle, Height=3.46mm, Lifecycle Status=Production, Manufacturer Part Number=USB4105-GF-A, Number of Contacts=16, Number of Ports=1, Number of Rows=1, Orientation=Horizontal, Pins=24, Pricing="1=0.78, 10=0.658, 25=0.6172, 50=0.5876, 100=0.5595, 250=0.5244 (USD)", REACH SVHC=Yes, RoHS=Compliant, Shell Finish=Nickel, Shell Material="Stainless Steel", Stock=6325, Supplier=DigiKey, Terminal Pitch=500µm, USB Standard="USB 2.0"
J?: "WR-BTB Board to Board Connector, Female Receptacle, height 11.75mm, pitch 0.8mm, 40p", Contact Resistance=50mohm, Manufacturer="Wurth Elektronik", Operating Temperature Max=85degC, Operating Temperature Min=-55degC, Rated Current=500mA, Working Voltage=50VAC, Category="Board-to-Board Connector", ComponentLink1Description="Website Link", ComponentLink1URL=https://www.we-online.com/redexpert/article/658801103040?ad, ComponentLink2Description="Datasheet Link", ComponentLink2URL=https://www.we-online.com/redexpert/spec/658801103040?ad, Gender="Female Receptacle", Height=11.75mm, Lead Pitch=0.8mm, Manufacturer Part Number=658801103040, Match Code=WR-BTB, Mount="Surface Mount", Number of Pins=40, Packaging="Tape and Reel"
L?: library part 78438335470, "WE-MAIA SMT Power Inductor, size 3015, 47uH, 0.5A, 2300mohm", Case/Size Code=3015, DC Resistance Max=2300mohm, Manufacturer="Wurth Elektronik", Operating Temperature Max=125degC, Operating Temperature Min=-40degC, Rated Current=0.5A, Saturation Current @ 10%=0.75A, Saturation Current @ 30%=1.5A, Self Resonant Frequency=8MHz, Automotive=Yes, Category="Power Inductors", ComponentLink1Description="Website Link", ComponentLink1URL=https://www.we-online.com/redexpert/article/78438335470?ad, ComponentLink2Description="Datasheet Link", ComponentLink2URL=https://www.we-online.com/redexpert/spec/78438335470?ad, Height=1.5mm, Inductance=47uH, Length=3mm, Manufacturer Part Number=78438335470, Match Code=WE-MAIA, Mount="Surface Mount", Packaging="Tape and Reel", Width=3mm
MH? MH? MH? MH?: library part MTH-2P5MM-PLATED, "PLATED MOUNTING HOLE WITH 2.5MM DIAMETER"
P200 P203: "WR-WTB “J” Type THT Male Horizontal Shrouded Header, pitch 2.5 mm, 2 pins", Contact Resistance="20 mohm", Manufacturer="Wurth Elektronik", Operating Temperature Max=85degC, Operating Temperature Min=-25degC, Rated Current="3 A", Withstanding Voltage="800 V(AC)", Working Voltage="250 V(AC)", Category="Wire-to-Board Connector", ComponentLink1Description="Website Link", ComponentLink1URL=https://www.we-online.com/redexpert/article/68800211722?ad, ComponentLink2Description="Datasheet Link", ComponentLink2URL=https://www.we-online.com/redexpert/spec/68800211722?ad, Gender=Male, Height="4.2 mm", Lead Pitch="2.5 mm", Length="7.5 mm", Manufacturer Part Number=68800211722, Match Code=WR-WTB, Mount="Through Hole", Number of Pins=2, Number of Rows=1, Orientation=Horizontal, Packaging=Bag, Width="8.3 mm"
P201 P202: "WR-WTB “J” Type THT Male Horizontal Shrouded Header, pitch 2.5 mm, 6 pins", Contact Resistance="20 mohm", Manufacturer="Wurth Elektronik", Operating Temperature Max=85degC, Operating Temperature Min=-25degC, Rated Current="3 A", Withstanding Voltage="800 V(AC)", Working Voltage="250 V(AC)", Category="Wire-to-Board Connector", ComponentLink1Description="Website Link", ComponentLink1URL=https://www.we-online.com/redexpert/article/68800611722?ad, ComponentLink2Description="Datasheet Link", ComponentLink2URL=https://www.we-online.com/redexpert/spec/68800611722?ad, Gender=Male, Height="4.2 mm", Lead Pitch="2.5 mm", Length="17.5 mm", Manufacturer Part Number=68800611722, Match Code=WR-WTB, Mount="Through Hole", Number of Pins=6, Number of Rows=1, Orientation=Horizontal, Packaging=Bag, Width="8.3 mm"
P204 P205: "WR-PHD Pin Header, THT, Angled, pitch 2.54mm, 1 Row, 4P", Contact Resistance=20mOhm, Manufacturer="Wurth Elektronik", Operating Temperature Max=105degC, Operating Temperature Min=-40degC, Rated Current=3A, Withstanding Voltage=500V, Working Voltage=250V, Category="Board-to-Board Connectors", ComponentLink1Description="Website Link", ComponentLink1URL=https://www.we-online.com/redexpert/article/61300411021?ad, ComponentLink2Description="Datasheet Link", ComponentLink2URL=https://www.we-online.com/redexpert/spec/61300411021?ad, Gender="Pin Header", Lead Pitch=2.54mm, Manufacturer Part Number=61300411021, Match Code=WR-PHD, Mount="Through Hole", Number of Pins=4, Number of Rows=1, Orientation=Angled, Packaging=Bag
P?: "WR-PHD Pin Header, THT, Angled, pitch 2.54mm, 1 Row, 2P", Contact Resistance=20mOhm, Manufacturer="Wurth Elektronik", Operating Temperature Max=105degC, Operating Temperature Min=-40degC, Rated Current=3A, Withstanding Voltage=500V, Working Voltage=250V, Category="Board-to-Board Connectors", ComponentLink1Description="Website Link", ComponentLink1URL=https://www.we-online.com/redexpert/article/61300211021?ad, ComponentLink2Description="Datasheet Link", ComponentLink2URL=https://www.we-online.com/redexpert/spec/61300211021?ad, Gender="Pin Header", Lead Pitch=2.54mm, Manufacturer Part Number=61300211021, Match Code=WR-PHD, Mount="Through Hole", Number of Pins=2, Number of Rows=1, Orientation=Angled, Packaging=Bag
Q200 Q201 Q202 Q203 Q204: "TRANS NPN 45V 0.5A SOT23-3", Case/Package=SOT-23-3, Clock Frequency=100MHz, Collector Base Voltage (VCBO)=50V, Collector Emitter Breakdown Voltage=45V, Continuous Collector Current=500mA, Emitter Base Voltage (VEBO)=5V, Manufacturer=onsemi, Manufacturer Lifecycle Status=ACTIVE, Max Operating Temperature=150°C, Max Power Dissipation=300mW, Min Operating Temperature=-55°C, Supplier Part Number=SBC817-40LT3GOSCT-ND, Category=BJTs, China RoHS=Compliant, Collector Emitter Voltage (VCEO)=45V, ComponentLink1Description=https://datasheet.octopart.com:443/SBC817-40LT3G-onsemi-datasheet-175914671.pdf?src-supplier=IHS, ComponentLink1URL=https://datasheet.octopart.com:443/SBC817-40LT3G-onsemi-datasheet-175914671.pdf?src-supplier=IHS, ComponentLink2Description=https://datasheet.octopart.com:443/SBC817-40LT3G-ON-Semiconductor-datasheet-11547464.pdf?src-supplier=Upverter, ComponentLink2URL=https://datasheet.octopart.com:443/SBC817-40LT3G-ON-Semiconductor-datasheet-11547464.pdf?src-supplier=Upverter, ComponentLink3Description=https://datasheet.octopart.com:443/SBC817-40LT3G-ON-Semiconductor-datasheet-78758879.pdf?src-supplier=Master+Electronics, ComponentLink3URL=https://datasheet.octopart.com:443/SBC817-40LT3G-ON-Semiconductor-datasheet-78758879.pdf?src-supplier=Master+Electronics, ComponentLink4Description=https://datasheet.octopart.com:443/SBC817-40LT3G-onsemi-datasheet-189132499.pdf?src-supplier=Master+Electronics, ComponentLink4URL=https://datasheet.octopart.com:443/SBC817-40LT3G-onsemi-datasheet-189132499.pdf?src-supplier=Master+Electronics, ComponentLink5Description=https://datasheet.octopart.com:443/SBC817-40LT3G-ON-Semiconductor-datasheet-8110464.pdf?src-supplier=onsemi, ComponentLink5URL=https://datasheet.octopart.com:443/SBC817-40LT3G-ON-Semiconductor-datasheet-8110464.pdf?src-supplier=onsemi, ComponentLink6Description=https://datasheet.octopart.com:443/SBC817-40LT3G-ON-Semiconductor-datasheet-6400296.pdf?src-supplier=onsemi, ComponentLink6URL=https://datasheet.octopart.com:443/SBC817-40LT3G-ON-Semiconductor-datasheet-6400296.pdf?src-supplier=onsemi, ComponentLink7Description=https://datasheet.octopart.com:443/SBC817-40LT3G-onsemi-datasheet-133521192.pdf?src-supplier=TME, ComponentLink7URL=https://datasheet.octopart.com:443/SBC817-40LT3G-onsemi-datasheet-133521192.pdf?src-supplier=TME, ComponentLink8Description=http://sigma.octopart.com:80/15540786/rohs_certificate/ON-Semiconductor-SBC817-40LT3G.pdf?src-supplier=Compliance+Statements, ComponentLink8URL=http://sigma.octopart.com:80/15540786/rohs_certificate/ON-Semiconductor-SBC817-40LT3G.pdf?src-supplier=Compliance+Statements, ComponentLink9Description=http://sigma.octopart.com:80/15684525/materials_sheet/ON-Semiconductor-SBC817-40LT3G.csv?src-supplier=Compliance+Statements, ComponentLink9URL=http://sigma.octopart.com:80/15684525/materials_sheet/ON-Semiconductor-SBC817-40LT3G.csv?src-supplier=Compliance+Statements, ComponentLink10Description=http://sigma.octopart.com:80/150631289/rohs_statement/ON-Semiconductor-SBC817-40LT3G.pdf?src-supplier=Compliance+Statements, ComponentLink10URL=http://sigma.octopart.com:80/150631289/rohs_statement/ON-Semiconductor-SBC817-40LT3G.pdf?src-supplier=Compliance+Statements, ComponentLink11Description=http://sigma.octopart.com:80/reach_statement/ON-Semiconductor-company-79.pdf?src-supplier=Compliance+Statements, ComponentLink11URL=http://sigma.octopart.com:80/reach_statement/ON-Semiconductor-company-79.pdf?src-supplier=Compliance+Statements, ComponentLink12Description=https://octopart.com:443/opatz8j6/c1?t=cEC30QwZsyb0x-FMX1jhecc8cj0lODbyQVaJL5I4EOudI-i4uiyo8QJe7x8WGpb_UfldyhXdI6wTsOpeJ5HWz7Kzleo1EiYpUhSwBawIenFlUCJsMQESd9nlIcVrbvWrabnb6HpXCtvxDkswRDKZDOG3MBWymJDy-mDPZ7u5UlptsX8-ONvWANeBowi-w7nz9iZWLyjqVoM_QTKEQgTILpDidA8CXVyMync_ukwLaadxciX7hbgDafM4N20bPQPEg7z2Sm1KwG15cEibpJqtQ1hKuQpn-edZc_o2ddvdnsTvT3gddPA_45tVxaNa9XWOJj00WFdTbgFSlU6TTFEybWVRRlK52823bHwN5uVZ-7M&src-supplier=Compliance+Statements, ComponentLink12URL=https://octopart.com:443/opatz8j6/c1?t=cEC30QwZsyb0x-FMX1jhecc8cj0lODbyQVaJL5I4EOudI-i4uiyo8QJe7x8WGpb_UfldyhXdI6wTsOpeJ5HWz7Kzleo1EiYpUhSwBawIenFlUCJsMQESd9nlIcVrbvWrabnb6HpXCtvxDkswRDKZDOG3MBWymJDy-mDPZ7u5UlptsX8-ONvWANeBowi-w7nz9iZWLyjqVoM_QTKEQgTILpDidA8CXVyMync_ukwLaadxciX7hbgDafM4N20bPQPEg7z2Sm1KwG15cEibpJqtQ1hKuQpn-edZc_o2ddvdnsTvT3gddPA_45tVxaNa9XWOJj00WFdTbgFSlU6TTFEybWVRRlK52823bHwN5uVZ-7M&src-supplier=Compliance+Statements, ComponentLink13Description=https://octopart.com:443/opatz8j6/c1?t=zgMoQUE-FAGizIL2uNADbP3CQfJXduVKNLOt0cT-C7XNOnl5EOgq1b4UVzb0SZjomH3a3CKF513mPEsnVuWFTldNModuoiOAROM-U7UMjU1TiA4JeYDoVNfia-psQDQPr2NtqLaOU9Ju06PrsXVFYjz3NjgsSVJa-5X9CcWQ1HPxPGGUjhKccWy9QJVPTcefUdorkFOZvdb3XFmpP_42jgzyR9ZUQAURqjwANTg96Z5ittV_NTML0IEyFPhh0jLh0am3ICJpb8VA9ph6AsqLc9j4fhdilqUiQTpG4UGLijUcgX0mpfEUR-9G0JRIiKjoFhJPWB3BEKd5JcwsK41biiNJ-0hjTcgtgsqlWYFFTPLS&src-supplier=Compliance+Statements, ComponentLink13URL=https://octopart.com:443/opatz8j6/c1?t=zgMoQUE-FAGizIL2uNADbP3CQfJXduVKNLOt0cT-C7XNOnl5EOgq1b4UVzb0SZjomH3a3CKF513mPEsnVuWFTldNModuoiOAROM-U7UMjU1TiA4JeYDoVNfia-psQDQPr2NtqLaOU9Ju06PrsXVFYjz3NjgsSVJa-5X9CcWQ1HPxPGGUjhKccWy9QJVPTcefUdorkFOZvdb3XFmpP_42jgzyR9ZUQAURqjwANTg96Z5ittV_NTML0IEyFPhh0jLh0am3ICJpb8VA9ph6AsqLc9j4fhdilqUiQTpG4UGLijUcgX0mpfEUR-9G0JRIiKjoFhJPWB3BEKd5JcwsK41biiNJ-0hjTcgtgsqlWYFFTPLS&src-supplier=Compliance+Statements, Country of Origin="Mainland China", Element Configuration=Single, Export Control Classification Number (ECCN) Code=EAR99, Frequency=100MHz, Halogen Free="Halogen Free", hFE Min=250, Introduction Date=1991-03-01, Lead Free="Lead Free", Lifecycle Status=Production, Manufacturer Part Number=SBC817-40LT3G, Max Breakdown Voltage=45V, Max Collector Current=500mA, Number of Elements=1, Number of Terminals=3, Packaging="Tape and Reel", Pins=3, Polarity=NPN, Power Dissipation=300mW, Pricing="1=0.24, 10=0.146, 100=0.0904, 500=0.06616, 1000=0.05829, 2000=0.05165, 5000=0.04443 (USD)", Radiation Hardening=No, REACH SVHC=Yes, RoHS=Compliant, Schedule B="8541210080, 8541210080|8541210080, 8541210080|8541210080|8541210080, 8541210080|8541210080|8541210080|8541210080", Stock=144045, Supplier=DigiKey, Transition Frequency=100MHz
R200 R204 R206 R212 R214 R219 R221 R226: library part RC0603FR-07487RL, "RES 487 OHM 1% 1/10W 0603", Case Code (Imperial)=0603, Case Code (Metric)=1608, Manufacturer="Yageo Group", Max Operating Temperature=155°C, Max Power Dissipation=100mW, Min Operating Temperature=-55°C, Supplier Part Number=311-487HRCT-ND, Temperature Coefficient=±200ppm/°C, Tolerance=1%, Voltage Rating=75V, Voltage Rating (AC)=50V, Case/Package=0603, Category="Chip SMD Resistors", China RoHS=Non-Compliant, Component Link Description=https://www.yageogroup.com/content/datasheet/asset/file/PYU-RC_GROUP_51_ROHS_L, Component Link URL=https://www.yageogroup.com/content/datasheet/asset/file/PYU-RC_GROUP_51_ROHS_L, Composition="Thick Film", Contact Plating=Tin, Datasheet=https://www.yageogroup.com/content/datasheet/asset/file/PYU-RC_GROUP_51_ROHS_L, Depth=800µm, Features="Moisture Resistant", Height=450µm, Lead Free="Lead Free", Length=1.6mm, Lifecycle Status=Production, Manufacturer Part Number=RC0603FR-07487RL, Military Standard=Not, Mounting Technology="Surface Mount", Number of Terminals=2, Number of Terminations=2, Packaging="Tape & Reel", Power Dissipation=100mW, Power Rating=100mW, Radiation Hardening=No, REACH SVHC=Yes, RoHS=Compliant, Supplier=DigiKey, Termination=SMD/SMT, Voltage Rating (DC)=50V, Weight=2.012816mg, Width=800µm, Working Voltage=75V
R201 R205 R207 R208 R209 R213 R215 R220 R222 R227 R231 R? R? R? R?: library part RC0603FR-0710KL, "RES 10K OHM 1% 1/10W 0603", Case Code (Imperial)=0603, Case Code (Metric)=1608, Manufacturer="Yageo Group", Max Operating Temperature=155°C, Max Power Dissipation=100mW, Min Operating Temperature=-55°C, Supplier Part Number=311-10.0KHRCT-ND, Temperature Coefficient=±200ppm/°C, Tolerance=1%, Voltage Rating=75V, Voltage Rating (AC)=50V, Case/Package=0603, Category="Chip SMD Resistors", China RoHS=Non-Compliant, Component Link Description=https://www.yageogroup.com/content/datasheet/asset/file/PYU-RC_GROUP_51_ROHS_L, Component Link URL=https://www.yageogroup.com/content/datasheet/asset/file/PYU-RC_GROUP_51_ROHS_L, Composition="Thick Film", Contact Plating=Tin, Datasheet=https://www.yageogroup.com/content/datasheet/asset/file/PYU-RC_GROUP_51_ROHS_L, Depth=800µm, Features="Moisture Resistant", Height=450µm, Lead Free="Lead Free", Length=1.6mm, Lifecycle Status=Production, Manufacturer Part Number=RC0603FR-0710KL, Military Standard=Not, Mounting Technology="Surface Mount", Number of Terminals=2, Number of Terminations=2, Packaging="Tape & Reel", Power Dissipation=100mW, Power Rating=100mW, Radiation Hardening=No, REACH SVHC=Yes, RoHS=Compliant, Supplier=DigiKey, Termination=SMD/SMT, Voltage Rating (DC)=50V, Weight=2.012816mg, Width=800µm, Working Voltage=75V
R202 R203 R216 R217 R218: library part RC0603FR-0717K8L, "RES 17.8K OHM 1% 1/10W 0603", Case Code (Imperial)=0603, Case Code (Metric)=1608, Manufacturer="Yageo Group", Max Operating Temperature=155°C, Max Power Dissipation=100mW, Min Operating Temperature=-55°C, Supplier Part Number=311-17.8KHRCT-ND, Temperature Coefficient=±200ppm/°C, Tolerance=1%, Voltage Rating=75V, Voltage Rating (AC)=50V, Case/Package=0603, Category="Chip SMD Resistors", China RoHS=Non-Compliant, Component Link Description=https://www.yageogroup.com/content/datasheet/asset/file/PYU-RC_GROUP_51_ROHS_L, Component Link URL=https://www.yageogroup.com/content/datasheet/asset/file/PYU-RC_GROUP_51_ROHS_L, Composition="Thick Film", Contact Plating=Tin, Datasheet=https://www.yageogroup.com/content/datasheet/asset/file/PYU-RC_GROUP_51_ROHS_L, Depth=800µm, Features="Moisture Resistant", Height=450µm, Lead Free="Lead Free", Length=1.6mm, Lifecycle Status=Production, Manufacturer Part Number=RC0603FR-0717K8L, Military Standard=Not, Mounting Technology="Surface Mount", Number of Terminals=2, Number of Terminations=2, Packaging="Tape & Reel", Power Dissipation=100mW, Power Rating=100mW, Radiation Hardening=No, REACH SVHC=Yes, RoHS=Compliant, Supplier=DigiKey, Termination=SMD/SMT, Voltage Rating (DC)=50V, Weight=2.012816mg, Width=800µm, Working Voltage=75V